# EAGLE board controller (EAGLE 9.5.2)
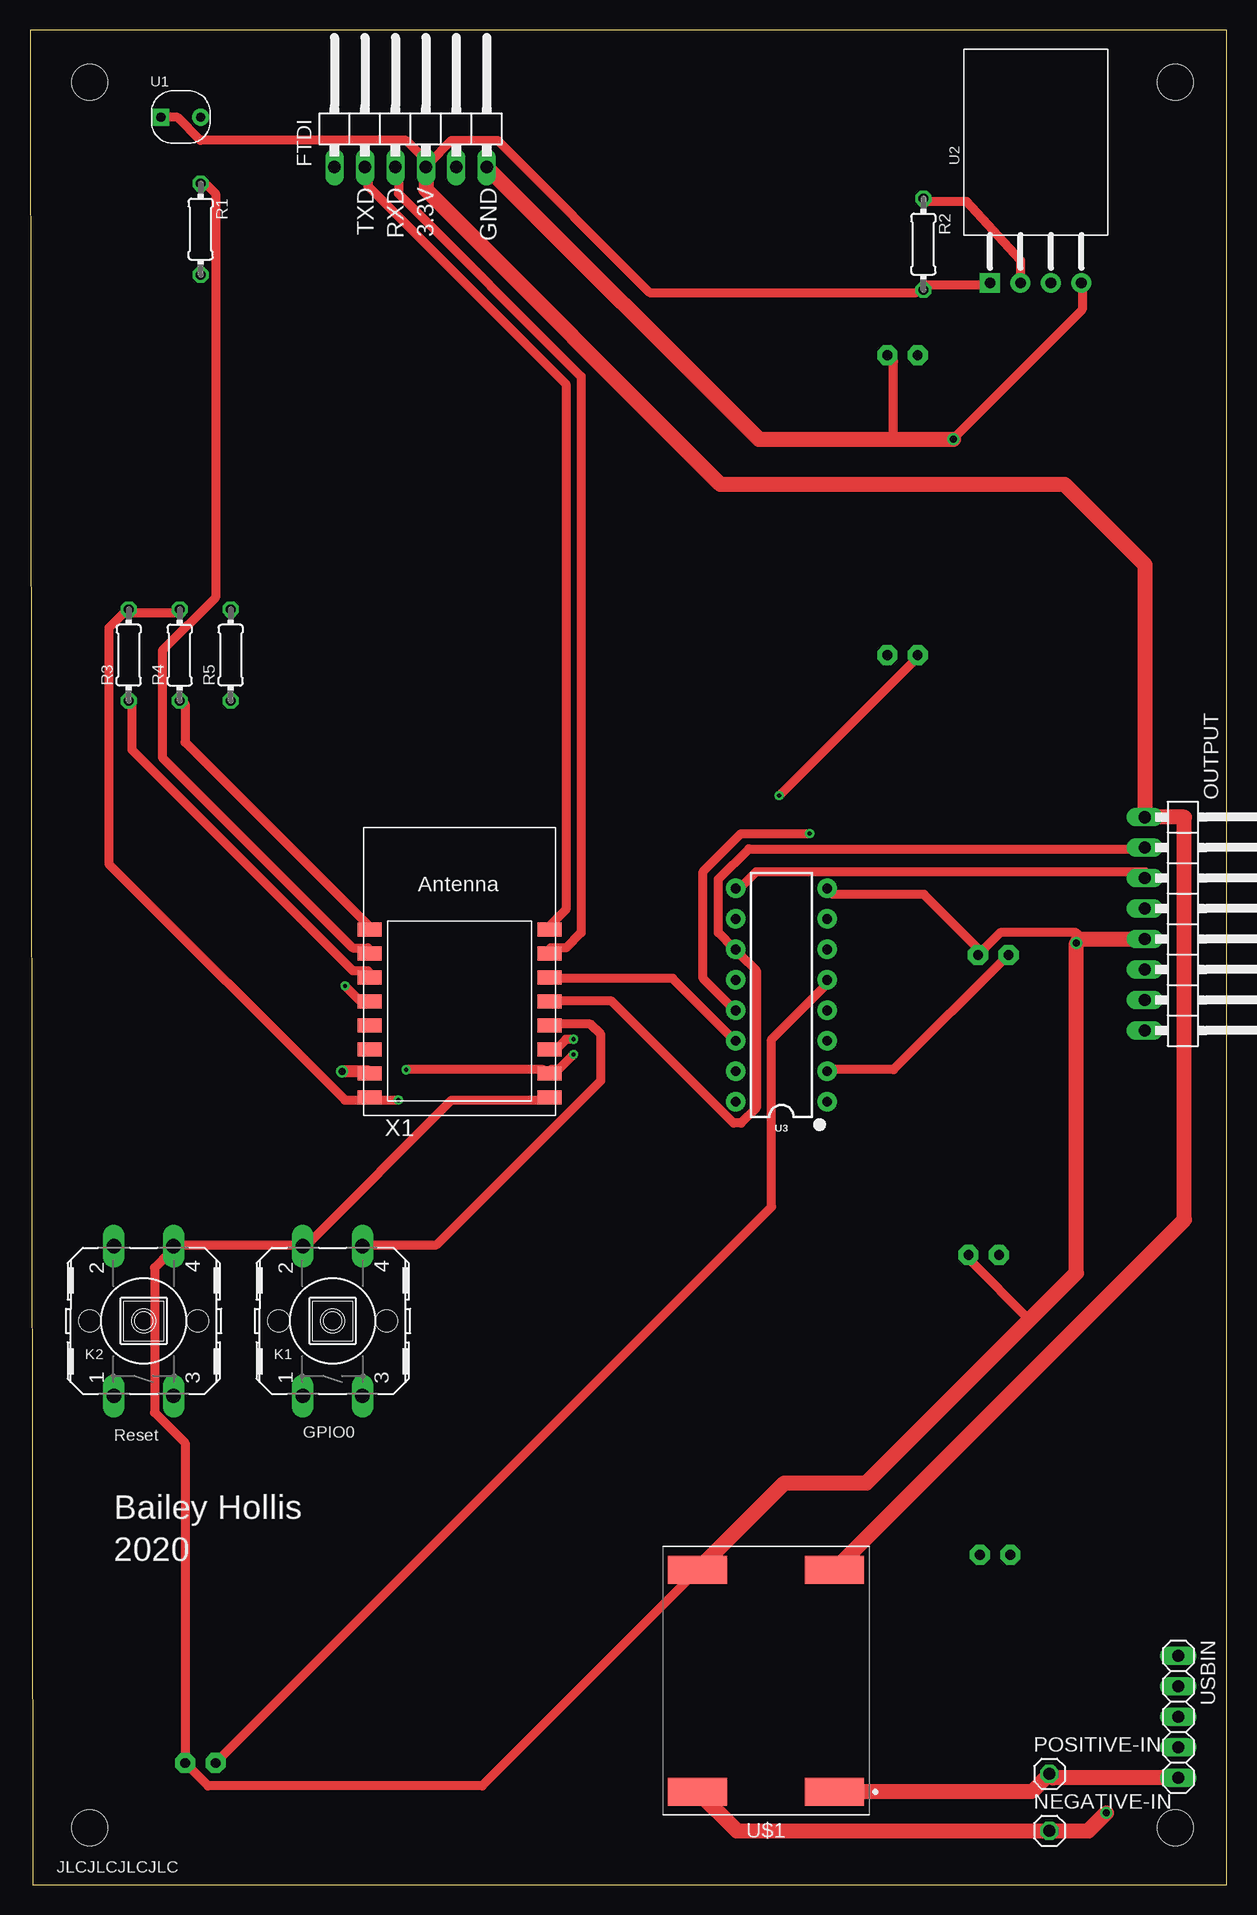
[diagram p0: board, top side]
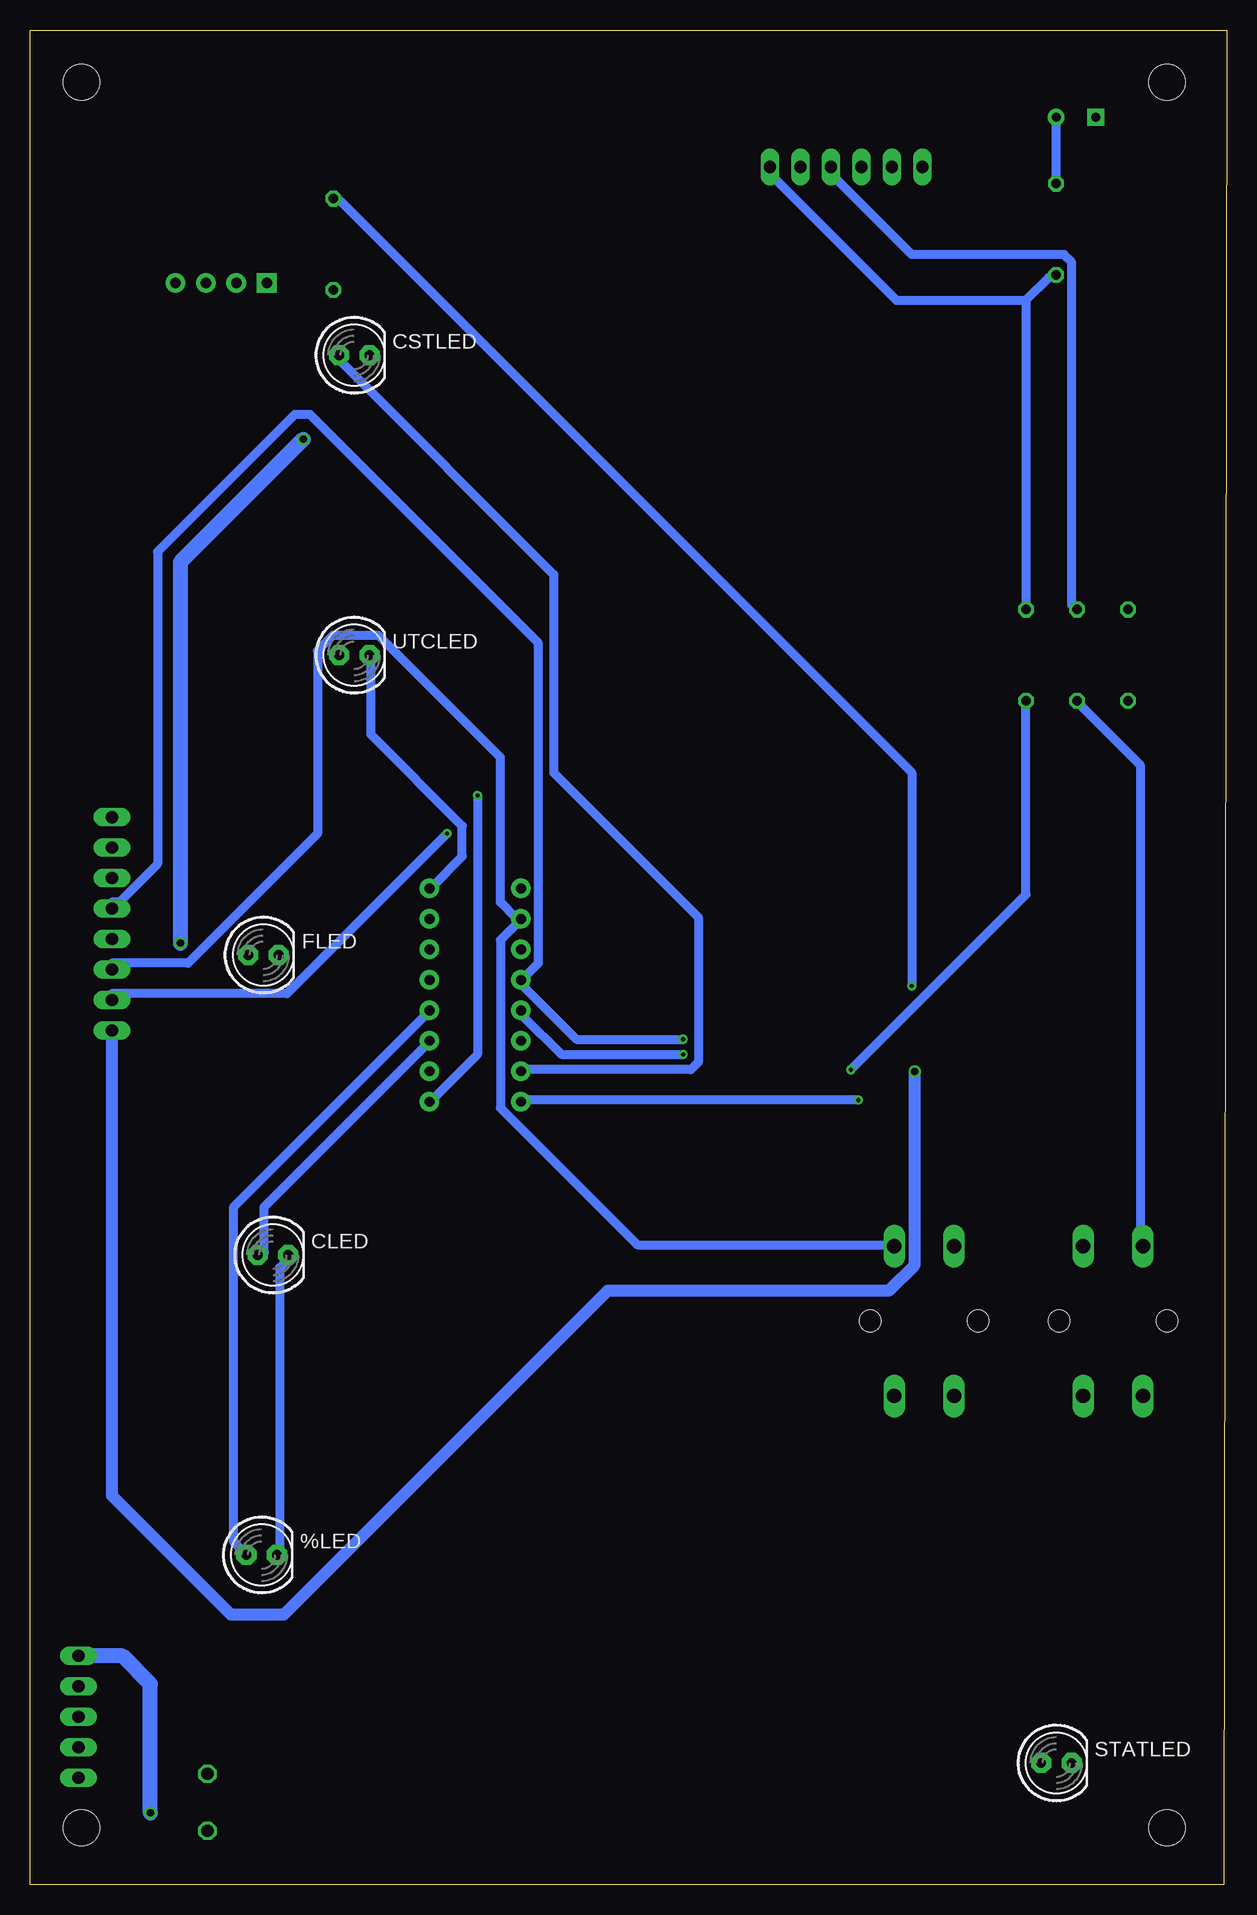
[diagram p1: board, bottom side, seen from below]

Size 99.77 x 154.61 mm. Coordinates in mm from the lower left corner, seen from the top.
Outline: 0.23,0 99.77,0 99.77,154.61 0,154.61 0.23,0
Copper layers (1*16): Top 0.035mm / dielectric 1.5mm / Bottom 0.035mm
Design rules "default *": minimum track width 30mil, minimum drill 0.35mm, track to track 20mil, track to pad 6mil, pad to pad 6mil, via to via 6mil, smd to smd 6mil, copper to edge 40mil, drill to drill 6mil, minimum pad ring 10mil, minimum via ring 8mil, stop-mask expansion 4mil, vias tented up to drill 0mil, thermal gap 10mil
Holes 3 mm at 4.98,4.75 95.48,4.75 95.48,150.25 4.98,150.25

## Footprints (pad centres in the part's own frame; a part is rotated, then mirrored left to right if it is on the bottom)
LED5MM = drill 0.813 pad 1.676 octagon: A -1.27,0; K 1.27,0
1X06/90 = drill 1.016 long: 1 -6.35,-3.81; 2 -3.81,-3.81; 3 -1.27,-3.81; 4 1.27,-3.81; 5 3.81,-3.81; 6 6.35,-3.81
B3F-40XX = drill 1.194 long: 1 -6.248,2.489; 2 6.248,2.489; 3 -6.248,-2.489; 4 6.248,-2.489 | hole 1.803: 0,-4.496; 0,4.496
1X01 = drill 1.016 octagon: 1 0,0
1X08/90 = drill 1.016 long: 1 -8.89,-3.81; 2 -6.35,-3.81; 3 -3.81,-3.81; 4 -1.27,-3.81; 5 1.27,-3.81; 6 3.81,-3.81; 7 6.35,-3.81; 8 8.89,-3.81
0204/7 = drill 0.813 octagon: 1 -3.81,0; 2 3.81,0
SNR2-3.0 = drill 0.762 pad 1.397 square: 1 -1.651,0 | drill 0.762 pad 1.397: 2 1.651,0
SNR4-2.54-15.5X12.0X5.5MM = drill 0.889 pad 1.651 square: 1 -11.75,3.81 | drill 0.889 pad 1.651: 2 -11.75,1.27; 3 -11.75,-1.27; 4 -11.75,-3.81
DIP16 = drill 0.813 pad 1.626: 1 -8.89,-3.81; 2 -6.35,-3.81; 3 -3.81,-3.81; 4 -1.27,-3.81; 5 1.27,-3.81; 6 3.81,-3.81; 7 6.35,-3.81; 8 8.89,-3.81; 9 8.89,3.81; 10 6.35,3.81; 11 3.81,3.81; 12 1.27,3.81; 13 -1.27,3.81; 14 -3.81,3.81; 15 -6.35,3.81; 16 -8.89,3.81
DIODFN1720X2240X160-4N = smd 4.912 x 2.332: 1 -5.7,9.25; 2 -5.7,-9.25; 3 5.7,-9.25; 4 5.7,9.25
1X05 = drill 1.016 long: 1 -5.08,0; 2 -2.54,0; 3 0,0; 4 2.54,0; 5 5.08,0
ESP-12 = smd 2 x 1.2: 1 -7.5,4.5; 2 -7.5,2.5; 3 -7.5,0.5; 4 -7.5,-1.5; 5 -7.5,-3.5; 6 -7.5,-5.5; 7 -7.5,-7.5; 8 -7.5,-9.5; 9 7.5,-9.5; 10 7.5,-7.5; 11 7.5,-5.5; 12 7.5,-3.5; 13 7.5,-1.5; 14 7.5,0.5; 15 7.5,2.5; 16 7.5,4.5

## Placement (x,y rotation side)
%LED  [LED5MM]  80.45,27.5 0 bottom
CLED  [LED5MM]  79.51,52.5 0 bottom
CSTLED  [LED5MM]  72.74,127.5 0 bottom
FLED  [LED5MM]  80.31,77.5 0 bottom
FTDI  [1X06/90]  31.73,147 0 top
K1  GPIO 0  [B3F-40XX]  25.23,47 90 top
K2  Reset  [B3F-40XX]  9.48,47 90 top
NEGATIVE-IN  [1X01]  84.98,4.5 0 top
OUTPUT  [1X08/90]  96.75,80.1 270 top
POSITIVE-IN  [1X01]  84.98,9.25 0 top
R1  2.2k  [0204/7]  14.23,138 270 top
R2  10K  [0204/7]  74.48,136.75 270 top
R3  10k  [0204/7]  8.23,102.5 90 top
R4  10k  [0204/7]  12.48,102.5 270 top
R5  10k  [0204/7]  16.73,102.5 90 top
STATLED  [LED5MM]  14.2,10.16 0 bottom
U1  PHOTORESISTOR  [SNR2-3.0]  12.57,147.35 0 top
U2  DHT11  [SNR4-2.54-15.5X12.0X5.5MM]  83.84,145.27 90 top
U3  SN74HC595N  [DIP16]  62.65,74.16 90 top
U$1  3.3V OPTIMAL  [DIODFN1720X2240X160-4N]  61.36,17.02 180 top
USBIN  [1X05]  95.73,14 270 top
UTCLED  [LED5MM]  72.74,102.5 0 bottom
X1  [ESP-12]  35.8,75.13 0 top

## Library data of the parts
%LED CLED CSTLED FLED STATLED UTCLED X1 = adafruit
FTDI NEGATIVE-IN OUTPUT POSITIVE-IN USBIN = pinhead
K1 K2 = switch-omron; MF: OMRON COMPONENTS USA; MPN: B3F-4000; OC_FARNELL: 176434; OC_NEWARK: 36K3105
R1-R5 = resistor
U1 = OPL_Sensor-Transducer; MPN: PHOTORESISTOR-5528-10K
U2 = OPL_Sensor-Transducer; MPN: DHT11
U3 = SparkFun-IC-Logic; PROD_ID: IC-13123
U$1 = DIODFN1720X2240X160-4N

## Nets
+3V3: FTDI.4 OUTPUT.1 R2.2 R3.2 R4.1 U1.1 U2.1 U3.16 U$1.2 X1.8
CLEAR: K1.4 OUTPUT.6 U3.10 X1.12
CLOCK: OUTPUT.2 U3.11 X1.13
DATAIN: U3.14 X1.14
DATAOUT: OUTPUT.3 U3.9
ENABLE: OUTPUT.7 R5.1 U3.13 X1.10
GND: %LED.K CLED.K CSTLED.K FLED.K FTDI.6 K1.2 K2.4 OUTPUT.5 R1.2 R5.2 STATLED.K U2.4 U3.8 U$1.3 UTCLED.K X1.9
LATCH: OUTPUT.4 U3.12 X1.11
N$1: CSTLED.A U3.15
N$2: U3.1 UTCLED.A
N$3: NEGATIVE-IN.1 U$1.4 USBIN.1
N$4: POSITIVE-IN.1 U$1.1 USBIN.5
N$5: R1.1 U1.2 X1.2
N$6: FLED.A U3.2
N$7: CLED.A U3.3
N$8: %LED.A U3.4
N$9: STATLED.A U3.5
N$10: R3.1 X1.3
N$11: R2.1 U2.2 X1.4
N$12: FTDI.2 X1.16
N$13: FTDI.3 X1.15
N$14: K2.2 R4.2 X1.1
TICK: OUTPUT.8 X1.7

## Tracks (layer width: path | path; a pad name or v marks a point on that pad's centre or on a via)
+3V3  (via drill 0.35)
  Top 0.762: U2.1 79.61,133.35 74.53,133.35 R2.2 73.89,132.72 51.66,132.72 38.96,145.41 35.15,145.41 33.25,143.51 | 33.25,143.51 31.34,145.41 14.2,145.41 12.29,147.32 11.03,147.32 U1.1 | 33.25,143.51 FTDI.4 | R4.1 12.29,106.05 8.49,106.05 R3.2 7.85,106.05 6.58,104.78 6.58,85.09 26.27,65.41 28.17,65.41 X1.8 28.8,65.41 v30.71,65.41
  Top 1.27: U$1.2 96.23,55.44 96.23,89 OUTPUT.1 | OUTPUT.1 | FTDI.4 33,141.28 57.53,116.75 86.23,116.75 92.95,110.03 OUTPUT.1
  Bottom 0.762: v30.71,65.41 58.65,65.41 U3.16 | FTDI.4 32.61,142.88 32.61,142.24 26.27,135.89 13.57,135.89 12.93,135.25 12.93,106.68 R4.1
CLEAR
  Top 0.762: X1.12 43.41,71.75 46.7,71.75 47.58,70.87 47.58,67.04 33.88,53.34 28.17,53.34 K1.4
  Bottom 0.762: OUTPUT.6 92.94,76.83 86.59,76.83 75.8,87.63 75.8,102.87 74.53,104.14 70.72,104.14 60.55,93.98 60.55,81.92 59.28,80.64 U3.10 59.28,80.01 60.55,78.74 60.55,64.77 49.12,53.34 28.17,53.34 K1.4
CLOCK
  Top 0.762: X1.13 43.41,73.66 48.49,73.66 58.65,63.5 59.28,63.5 60.55,64.77 60.55,76.2 59.28,77.47 U3.11 58.65,78.11 57.38,79.38 57.38,83.82 59.92,86.36 92.94,86.36 OUTPUT.2
DATAIN
  Top 0.762: X1.14 43.41,75.56 53.57,75.56 58.65,70.48 U3.14
DATAOUT
  Top 0.762: OUTPUT.3 92.94,84.45 60.55,84.45 59.28,83.19 U3.9
ENABLE  (via drill 0.35)
  Top 0.762: v45.31,69.22 44.04,67.94 43.41,67.94 X1.10 42.77,67.94 v31.34,67.94 | v65,87.63 59.28,87.63 56.11,84.45 56.11,75.56 58.65,73.03 U3.13
  Bottom 0.762: v45.31,69.22 55.47,69.22 58.65,72.39 U3.13 | v31.34,67.94 16.74,82.55 16.74,98.42 R5.1 | v65,87.63 78.34,74.3 92.94,74.3 OUTPUT.7
GND  (via drill 0.6, 0.6 pad 0.85)
  Top 0.762: X1.9 42.77,65.41 35.15,65.41 23.09,53.34 K1.2 22.46,53.34 12.29,53.34 K2.4 11.66,52.7 10.39,51.44 10.39,39.37 12.93,36.83 STATLED.K 14.84,8.26 37.7,8.26 55.47,26.04 U$1.3 | U3.8 66.91,82.55 74.53,82.55 78.97,78.11 FLED.K 79.61,78.11 80.88,79.38 87.23,79.38 87.56,78.83 | U2.4 87.73,133.44 87.73,131.31 77.06,120.65 v76.98,120.5 | 71.98,120.5 71.98,127 CSTLED.K | CLED.K 78.34,52.07 83.32,47.09 83.42,46.99
  Top 1.27: U$1.3 62.89,33.5 69.73,33.5 83.32,47.09 87.23,51 v87.23,78.5 87.56,78.83 OUTPUT.5 | FTDI.6 60.77,120.5 71.98,120.5 v76.98,120.5
  Bottom 0.762: UTCLED.K 71.35,102.23 71.35,95.89 63.73,88.27 63.73,85.72 66.27,83.19 U3.8 | 16.74,132.08 16.74,106.68 R5.2 | 16.74,132.08 14.84,133.99 R1.2 | %LED.K 78.97,27.94 78.97,51.44 78.34,52.07 CLED.K | 16.74,132.08 27.54,132.08 38.33,142.88 FTDI.6
  Bottom 1.27: v76.98,120.5 87.23,110.25 v87.23,78.5
LATCH  (via drill 0.35)
  Top 0.762: v45.31,70.48 44.68,70.48 44.04,69.85 43.41,69.85 X1.11
  Bottom 0.762: v45.31,70.48 54.2,70.48 58.65,74.93 U3.12 58.65,75.56 57.38,76.83 57.38,103.5 76.43,122.56 77.7,122.56 89.13,111.12 89.13,85.09 92.31,81.92 92.94,81.92 OUTPUT.4
N$1
  Bottom 0.762: U3.15 58.65,67.94 44.68,67.94 44.04,68.58 44.04,80.64 56.11,92.71 56.11,109.22 73.89,127 CSTLED.A
N$2  (via drill 0.35)
  Top 0.762: v62.46,90.81 73.89,102.23 UTCLED.A
  Bottom 0.762: v62.46,90.81 62.46,69.22 66.27,65.41 U3.1
N$3  (via drill 0.6)
  Top 1.27: U$1.4 58.93,4.5 NEGATIVE-IN.1 88.23,4.5 v89.73,6
  Bottom 1.27: v89.73,6 89.73,16.75 92.06,19.08 USBIN.1
N$4
  Top 1.27: USBIN.5 85.31,8.92 POSITIVE-IN.1 83.5,7.77 U$1.1
N$5
  Top 0.762: X1.2 28.17,78.11 26.9,78.11 11.03,93.98 11.03,102.87 15.47,107.31 15.47,140.97 14.84,141.6 R1.1
  Bottom 0.762: U1.2 14.2,147.32 14.2,142.24 R1.1
N$6
  Top 0.762: U3.2 66.91,67.94 71.98,67.94 81.51,77.47 FLED.A
N$7
  Bottom 0.762: U3.3 66.91,69.85 80.24,56.52 80.24,52.7 CLED.A
N$8
  Bottom 0.762: U3.4 66.91,72.39 82.78,56.52 82.78,28.57 82.15,27.94 %LED.A
N$9
  Top 0.762: STATLED.A 61.82,56.52 61.82,70.48 66.27,74.93 U3.5
N$10
  Top 0.762: X1.3 28.17,76.2 26.9,76.2 8.49,94.61 8.49,98.42 R3.1
N$11  (via drill 0.35)
  Top 0.762: v26.27,74.93 27.54,73.66 28.17,73.66 X1.4 | U2.2 82.57,135.41 78.07,140.34 74.53,140.34 R2.1
  Bottom 0.762: v26.27,74.93 26.27,92.71 73.89,140.34 R2.1
N$12
  Top 0.762: X1.16 43.41,80.01 44.68,81.28 44.68,125.09 28.17,141.6 28.17,142.88 FTDI.2
N$13
  Top 0.762: X1.15 43.41,78.11 44.68,78.11 45.95,79.38 45.95,125.73 30.71,140.97 30.71,142.88 FTDI.3
N$14
  Top 0.762: X1.1 28.17,80.01 12.93,95.25 12.93,98.42 R4.2
  Bottom 0.762: K2.2 7.22,53.34 7.22,93.34 12.29,98.42 R4.2
TICK  (via drill 0.6)
  Top 1.016: X1.7 28.12,67.81 v26.02,67.81
  Bottom 1.016: v26.02,67.81 26.02,51.69 28.17,49.53 51.59,49.53 78.59,22.54 83.03,22.54 92.94,32.45 OUTPUT.8

## Text on the board
tNames: TXD | RXD | 3.3V | GND | Reset | GPIO0 | Bailey Hollis | 2020 | JLCJLCJLCJLC